# Altium PCB DigitalMaze.PcbDoc
Units mm, origin at the board's own origin, x right, y up, seen from the top; angles counter-clockwise.
Board outline 40.1 x 40.1 mm, 2 copper layers (Top Layer, Bottom Layer); 17 components, 11 nets, 95 pads, 17 vias.
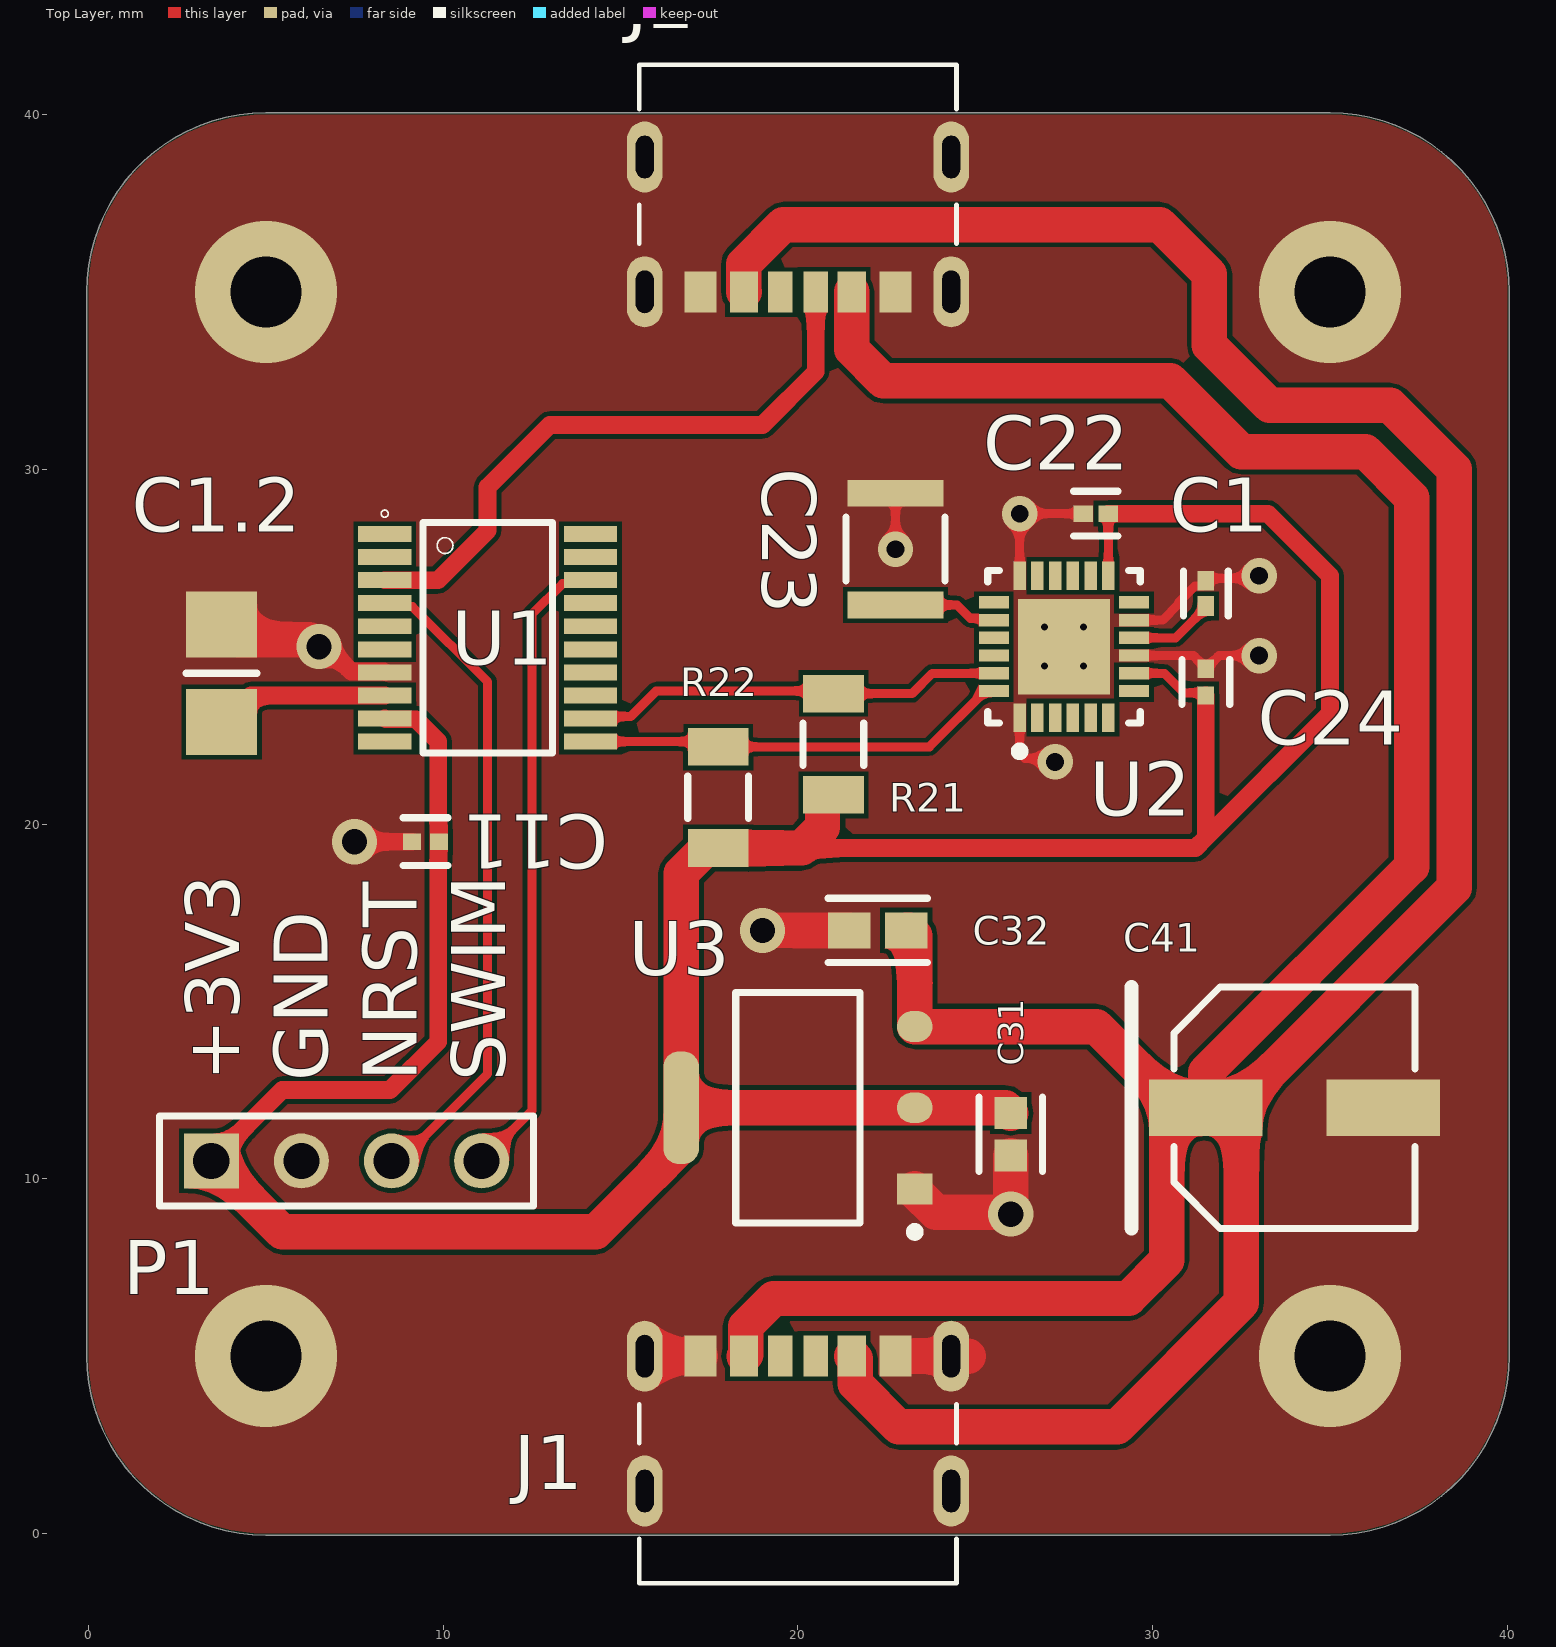
[diagram p0: Top Layer view]
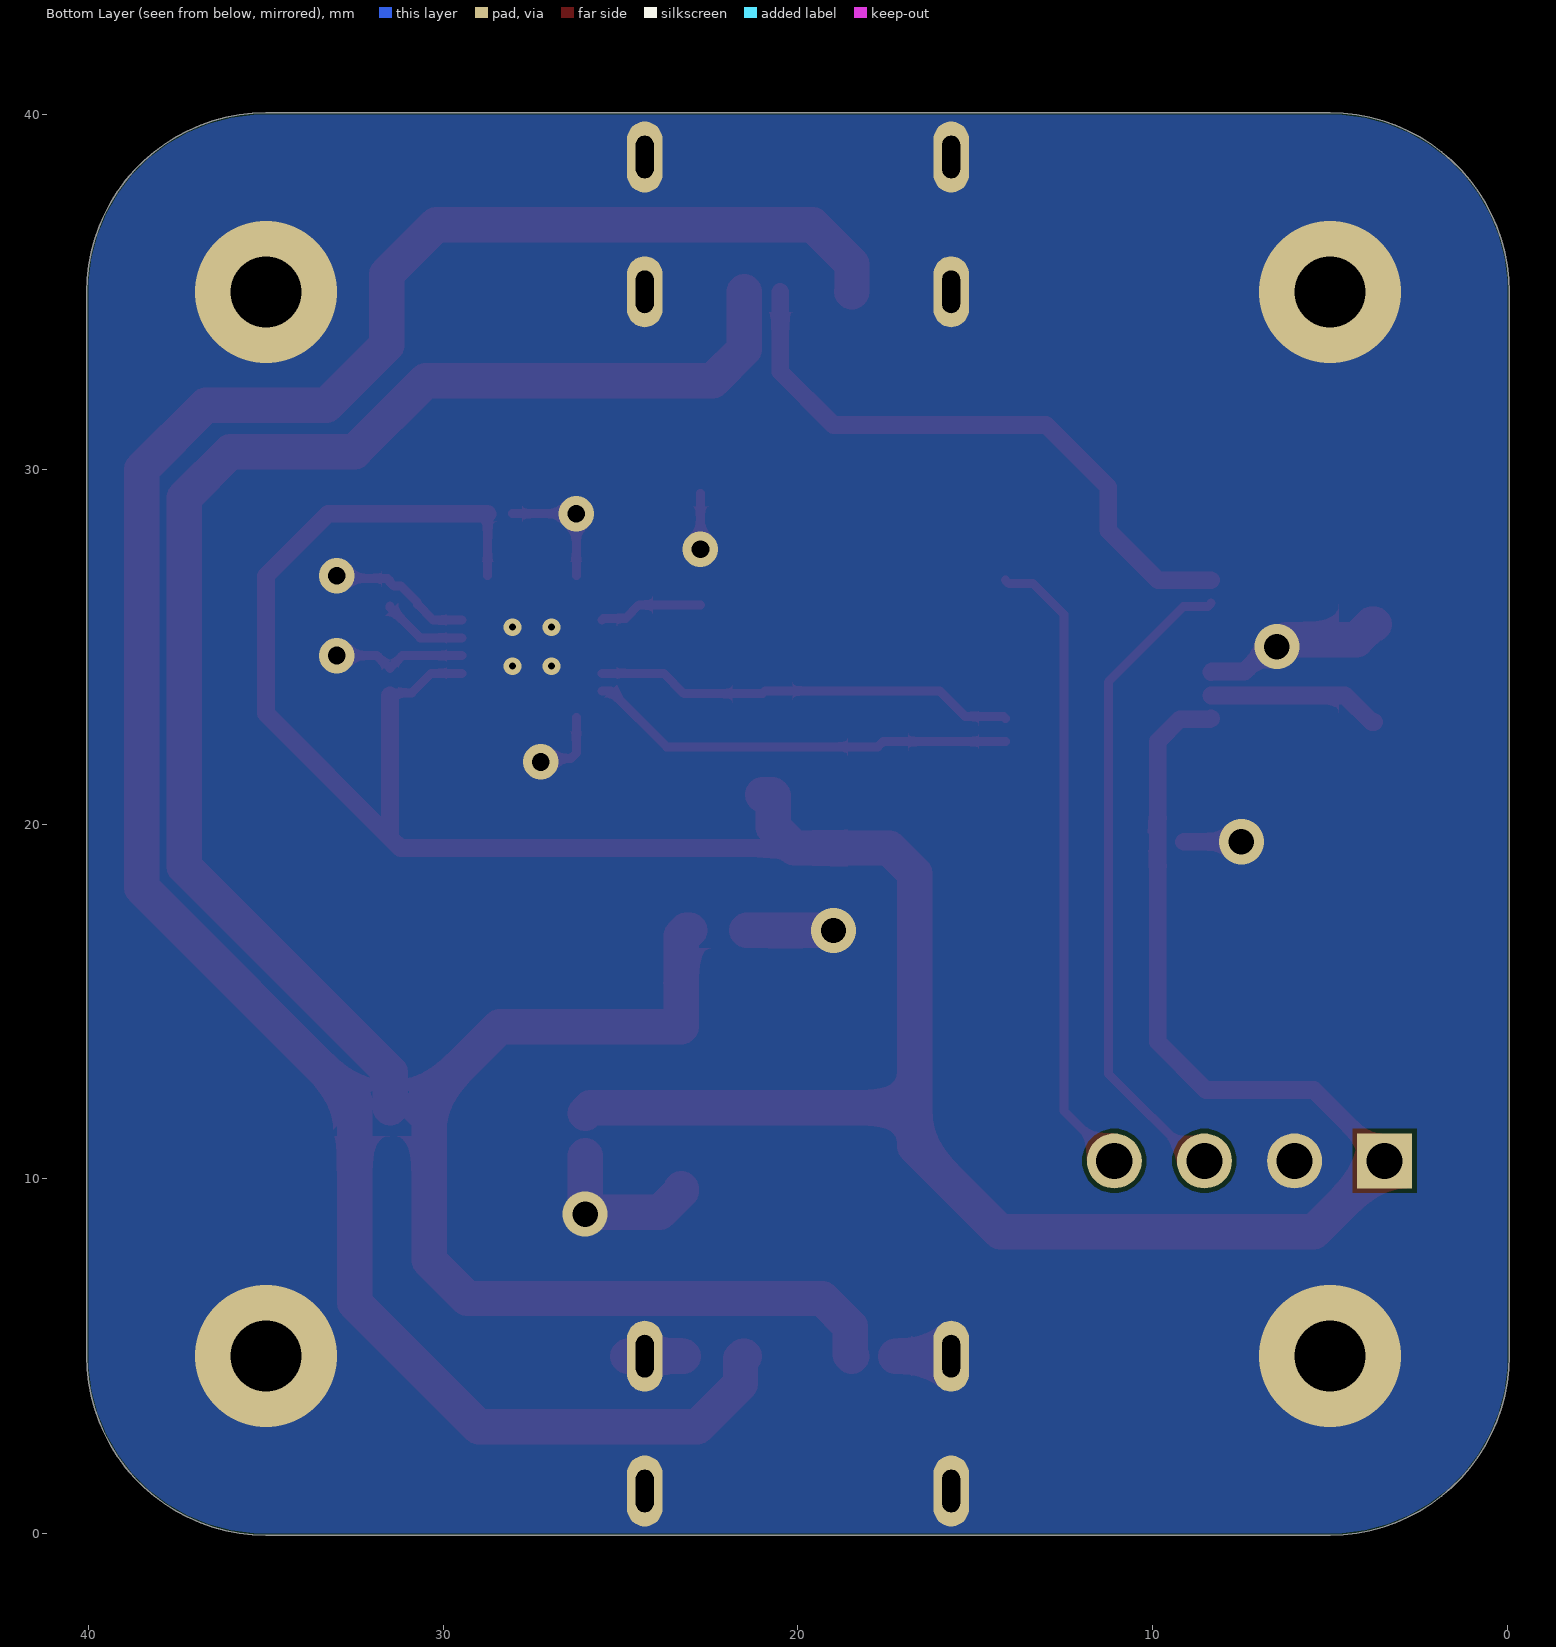
[diagram p1: Bottom Layer view, seen from below]
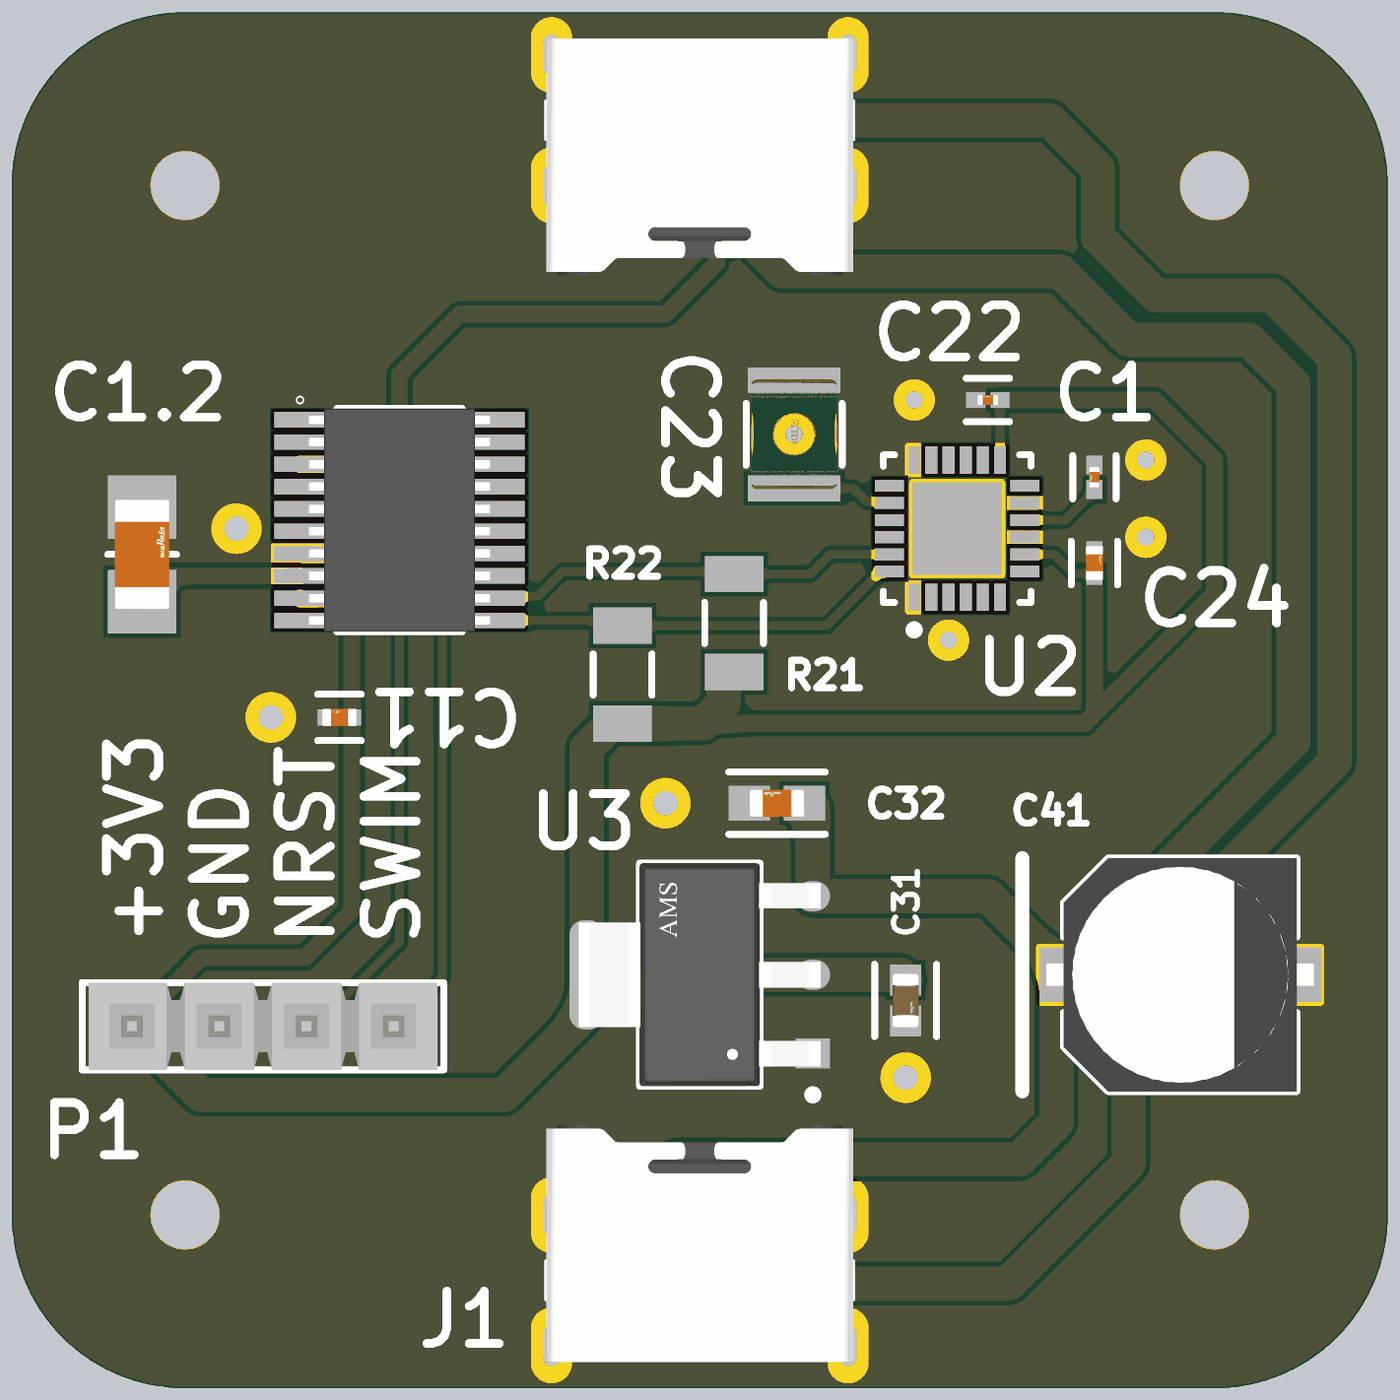
[diagram p2: 3D render of the assembled board from above, using the file's embedded part models]

## Layer stack, top to bottom
Top Solder: solder mask 0.0102, Solder Resist, Dk 3.5
Top Layer: signal copper 0.0356
Dielectric 1: dielectric 0.32, FR-4, Dk 4.8
Bottom Layer: signal copper 0.0356
Bottom Solder: solder mask 0.0102, Solder Resist, Dk 3.5

## Board outline
-0.05,5 -0.05,35 cw(c5,35) 5,40.05 35,40.05 cw(c35,35) 40.05,35 40.05,5 cw(c35,5) 35,-0.05 5,-0.05 cw(c5,5)

## Design rules (kind name [scope] priority, off if disabled: settings)
Clearance [All] p1: gap=0.127 ignorepadtopadclearanceinfootprint=TRUE
MinimumSolderMaskSliver [All] p1: minsoldermaskwidth=0.04
PolygonConnect [All] p1: connectstyle=Direct reliefconductorwidth=0.254 reliefentries=4 polygonreliefangle="90 Angle" airgapwidth=0.254
RoutingVias [All] p1: holewidth=1 width=1 viastyle="Through Hole" minholewidth=0.5 minwidth=1 maxholewidth=2 maxwidth=4
SilkToSolderMaskClearance [IsPad] p1: minsilkscreentomaskgap=0.2 clearancetoexposedcopper=TRUE
SolderMaskExpansion [All] p1: expansion=0.102 istentingtop=FALSE
SupplyNets "Schematic Supply Nets_2" [InNet('VCC_3.3V')] p1: voltage=0.000
SupplyNets "Schematic Supply Nets_1" [InNet('VCC_5V')] p2: voltage=0.000
SupplyNets "Schematic Supply Nets" [InNet('GND')] p3: voltage=0.000
Width [All] p1: maxlimit=1 minlimit=0.254 preferedwidth=0.5
28 further rules are at their usual default settings.

## Components (designator, comment, footprint, x,y, rotation, side; value= is the part's Value field where it differs from the comment)
C1 "0.10uF" FP-GRM033-0_03-IPC_A 31.5,26.5 r270 top
C1.2 "1uF" FP-GCG31C-0_3-IPC_A 3.75,24.25 r90 top
C11 "10nF" FP-GRM155-0_05-IPC_C 9.5,19.5 r180 top
C22 "0.1uF" FP-GRM033-0_03-IPC_A 28.396,28.75 r180 top
C23 "2.2 uF" FP-CGA6P-IPC_C 22.75,27.75 r270 top
C24 "10nF" FP-GRM155-0_05-IPC_C 31.5,24 r90 top
C31 "22uF" FP-GRM188-0_2-IPC_C 26,11.25 r270 top
C32 "10uF" FP-GRM188-0_1-e0_2_0_55-IPC_A 22.25,17 r180 top
C41 "100uF" PNSC-FK-V-D8_V 34,12 r0 top
J1 "UJC-HP-3-SMT-TR" CUI_UJC-HP-3-SMT-TR 20,4.995 r0 top
J2 "UJC-HP-3-SMT-TR" CUI_UJC-HP-3-SMT-TR 20,35.005 r180 top
P1 "TSW-104-08-G-S" SMTC-TSW-104-08-X-S 3.46,10.5 r0 top
R21 "4700 Ω" FP-RC1206-0_65-IPC_B 21,22.25 r270 top
R22 "4700 Ω" FP-RC1206-0_65-IPC_B 17.75,20.75 r270 top
U1 "STM8S103F3P6" SOP65P640X120-20N 11.25,25.25 r0 top
U2 "MPU-6050" IS-QFN-24_V 27.5,25 r90 top
U3 "AMS1117-3.3" FP-AMS1117-IPC_C 20,12 r180 top

## Footprints (in the part's own frame and the unit in brackets; to place one, negate y for a bottom-side part, rotate by r counter-clockwise, add the part's x,y. Pads: shape width x height; smd on the part's side, far side on the other; paste and mask are expansions set on the pad)
CUI_UJC-HP-3-SMT-TR [mm]
  rect 0.7x1.15 smd: A5(-0.5,0.005) B5(0.5,0.005)
  rect 0.8x1.15 smd: A9(1.52,0.005) B9(-1.52,0.005)
  rect 0.9x1.15 smd: A12(2.75,0.005) B12(-2.75,0.005)
  oval 1x2 hole 0.5 slot 1.2 at 90 deg: S1(-4.32,0) S2(4.32,0) S3(-4.32,-3.8) S4(4.32,-3.8)
  silkscreen extent -4.47,-6.4 4.47,-1.35, body extent -4.47,-4.28 4.47,2.62, height 1.93
FP-AMS1117-IPC_C [mm]
  rect 1.004x0.872 smd paste+0 mask+0: 1(-3.295,2.29)
  rrect100% 1.004x0.872 smd paste+0 mask+0: 2(-3.295,0) 3(-3.295,-2.29)
  rrect87% 1.004x3.182 smd paste+0 mask+0: 4(3.295,0)
  silkscreen extent -3.42,-3.25 1.75,3.62, body extent -3.9,-3.35 3.9,3.35, height 0.25
FP-CGA6P-IPC_C [mm]
  rect 0.753x2.704 smd paste+0 mask+0: 1(-1.575,0) 2(1.575,0)
  silkscreen extent -0.9,-1.4 0.9,1.4, body extent -2.05,-1.5 2.05,1.5, height 0.25
FP-GCG31C-0_3-IPC_A [mm]
  rect 1.853x2.004 smd paste+0 mask+0: 1(-1.375,0) 2(1.375,0)
  silkscreen extent 0,-1 0,1, body extent -2.8,-1.5 2.8,1.5, height 0.25
FP-GRM033-0_03-IPC_A [mm]
  rect 0.554x0.463 smd paste+0 mask+0: 1(-0.354,0) 2(0.354,0)
  silkscreen extent -0.63,-0.63 0.63,0.63, body extent -0.83,-0.43 0.83,0.43, height 0.25
FP-GRM155-0_05-IPC_C [mm]
  rect 0.515x0.472 smd paste+0 mask+0: 1(-0.379,0) 2(0.379,0)
  silkscreen extent -0.64,-0.67 0.64,0.67, body extent -0.74,-0.38 0.74,0.38, height 0.25
FP-GRM188-0_1-e0_2_0_55-IPC_A [mm]
  rect 1.208x1.012 smd paste+0 mask+0: 1(-0.802,0) 2(0.802,0)
  silkscreen extent -1.41,-0.91 1.41,0.91, body extent -1.91,-1.01 1.91,1.01, height 0.25
FP-GRM188-0_2-IPC_C [mm]
  rect 0.905x0.906 smd paste+0 mask+0: 1(-0.601,0) 2(0.601,0)
  silkscreen extent -1.05,-0.9 1.05,0.9, body extent -1.15,-0.6 1.15,0.6, height 0.25
FP-RC1206-0_65-IPC_B [mm]
  rect 1.058x1.712 smd paste+0 mask+0: 1(-1.427,0) 2(1.427,0)
  silkscreen extent -0.6,-0.86 0.6,0.86
IS-QFN-24_V [mm] "QFN, 24-Leads, Body 4x4mm, Pitch 0.5mm, Thermal Pad 2.7x2.6mm"
  rect 0.8x0.35 smd: 1(-2,1.25) 2(-2,0.75) 3(-2,0.25) 4(-2,-0.25) 5(-2,-0.75) 6(-2,-1.25) 13(2,-1.25) 14(2,-0.75) 15(2,-0.25) 16(2,0.25) 17(2,0.75) 18(2,1.25)
  rect 0.35x0.85 smd mask+0.102: 7(-1.25,-1.975) 8(-0.75,-1.975) 9(-0.25,-1.975) 10(0.25,-1.975) 11(0.75,-1.975) 12(1.25,-1.975) 19(1.25,1.975) 20(0.75,1.975) 21(0.25,1.975) 22(-0.25,1.975) 23(-0.75,1.975) 24(-1.25,1.975)
  rect 2.7x2.6 smd: 25(0,0)
  silkscreen extent -3.07,-2.15 2.15,2.15, body extent -2,-2 2,2, height 0.95
PNSC-FK-V-D8_V [mm] "CAPAE, 2-Leads, Body 6.80x6.80mm"
  rect 3.2x1.6 smd: 1(-2.5,0) 2(2.5,0)
  silkscreen extent -4.6,-3.4 3.4,3.4, body extent -3.9,-3.4 3.9,3.4, height 8
SMTC-TSW-104-08-X-S [mm] ".025 SQ Post Terminal Strip Assembly, 1x4 Pins, Vertical, 2.54mm Pitch, Male"
  rect 1.55x1.55 hole 1.02: 1(0,0)
  round 1.55 hole 1.02: 2(2.54,0) 3(5.08,0) 4(7.62,0)
  silkscreen extent -1.46,-1.27 9.08,1.27, body extent -1.27,-1.27 8.89,1.27, height 8.38
SOP65P640X120-20N [mm]
  rect 1.5x0.45 smd: 1(-2.9,2.925) 2(-2.9,2.275) 3(-2.9,1.625) 4(-2.9,0.975) 5(-2.9,0.325) 6(-2.9,-0.325) 7(-2.9,-0.975) 8(-2.9,-1.625) 9(-2.9,-2.275) 10(-2.9,-2.925) 11(2.9,-2.925) 12(2.9,-2.275) 13(2.9,-1.625) 14(2.9,-0.975) 15(2.9,-0.325) 16(2.9,0.325) 17(2.9,0.975) 18(2.9,1.625) 19(2.9,2.275) 20(2.9,2.925)
  silkscreen extent -3,-3.25 1.83,3.6, body extent -3.2,-3.25 3.2,3.25, height 0.53

## Part data
C1 C22: library part CMP-2010-01241-2, "Chip Multilayer Ceramic Capacitors for General Purpose, 0201, 0.10uF, X6S, 22%, 10%, 4V", Capacitance=100nF, Case Code (Imperial)=0201, Case Code (Metric)=0603, Dielectric=X6S, Max Operating Temperature=105°C, Min Operating Temperature=-55°C, Package Quantity=1, Tolerance=10%, Voltage Rating=4V, Case/Package=0201, Depth=0.3mm, Height=0.3mm, Lead Free="Lead Free", Length=0.6mm, Mount="Surface Mount", Packaging="Tape and Reel", Radiation Hardening=No, Termination=SMD/SMT, Thickness=0.013inch, Voltage Rating (DC)=4V, Width=0.012inch
C1.2: library part CMP-06035-041741-1, "AgPd Termination Conductive Glue Mounting Chip Multilayer Ceramic Capacitors for Automotive 1206 Package, X8R 15% 16V 1uF 20%"
C11 C24: library part CMP-2008-04637-5, "Chip Multilayer Ceramic Capacitors for General Purpose, 0402, 10000pF, X7R, 15%, 10%, 50V", Case Code (Imperial)=0402, Case Code (Metric)=1005, Dielectric=X7R, Max Operating Temperature=125°C, Min Operating Temperature=-55°C, Package Quantity=1, Tolerance=10%, Voltage=25V, Voltage Rating=50V, Capacitance=10nF, Case/Package=0402, Depth=0.5mm, Height=0.5mm, Lead Free="Lead Free", Length=1mm, Material=Ceramic, Mount="Surface Mount", Number of Pins=2, Packaging="Tape and Reel", Radiation Hardening=No, REACH SVHC="No SVHC", Termination=SMD/SMT, Thickness=0.022inch, Voltage Rating (DC)=50V, Width=0.02inch
C23: library part CMP-08246-000149-1, "Cap Ceramic 2.2uF 50V X7R 10% Pad SMD 1210 +125°C Automotive T/R", Capacitance=2.2uF, Case Code (Imperial)=1210, Case Code (Metric)=3225, Dielectric=X7R, Max Operating Temperature=125°C, Min Operating Temperature=-55°C, Package Quantity=1, Ratings=AEC-Q200, Tolerance=10%, Voltage Rating=50V, Case/Package=1210, Composition=Ceramic, Depth=2.5mm, Height=2mm, Lead Free="Lead Free", Length=3.2mm, Mount="Surface Mount", Packaging="Tape and Reel", REACH SVHC="No SVHC", Termination=SMD/SMT, Thickness=0.087inch, Voltage Rating (DC)=50V, Weight=0.000564oz, Width=2.5mm
C31: library part CMP-2000-06337-3, "Chip Multilayer Ceramic Capacitors for General Purpose, 0603, 22uF, X5R, 15%, 20%, 10V", Case Code (Imperial)=0603, Case Code (Metric)=1608, Dielectric=X5R, Max Operating Temperature=85°C, Min Operating Temperature=-55°C, Package Quantity=4000, Tolerance=20%, Voltage Rating=10V, Capacitance=22uF, Case/Package=0603, Depth=0.8mm, Height=0.8mm, Lead Free="Lead Free", Length=1.6mm, Material=Ceramic, Mount="Surface Mount", Packaging="Tape and Reel", REACH SVHC="No SVHC", Termination=SMD/SMT, Thickness=0.039inch, Voltage Rating (DC)=10V, Weight=0.000222oz, Width=0.8mm
C32: library part CMP-2006-02792-2, "Chip Multilayer Ceramic Capacitors for General Purpose, 0603, 10uF, X5R, 15%, 20%, 6.3V", Case Code (Imperial)=0603, Case Code (Metric)=1608, Dielectric=X5R, Max Operating Temperature=85°C, Min Operating Temperature=-55°C, Package Quantity=4000, Tolerance=20%, Voltage=6.3V, Capacitance=10uF, Case/Package=0603, Depth=0.8mm, Height=0.8mm, Lead Free="Lead Free", Length=1.6mm, Material=Ceramic, Mount="Surface Mount", Packaging="Tape and Reel", Radiation Hardening=No, REACH SVHC="No SVHC", Termination=SMD/SMT, Thickness=0.035inch, Voltage Rating=6.3V, Voltage Rating (DC)=6.3V, Width=0.031inch
C41: library part CMP-2000-06206-1, "Aluminum Electrolytic Capacitor, 100 uF, +/- 20%, 25 V, 2-Pin SMD (Size Code D8), -55 to 105 degC, RoHS, Tape and Reel", Capacitance=100µF, Case Size/Dimension=Ø6.3x7.7mm, Lifetime@Temperature=2000Hrs@105°C, Manufacturer=Panasonic, Operating Temp Range=-55to+105°C, Operating Temp-Max=105°C, Package Description="2-Pin Electrolytic Aluminum Capacitor, Body 6.6 x 6.6 mm", Package Reference=FK-V-D8, Rated Voltage=25V, Ripple Current=280mA, Datasheet URL=http://industrial.panasonic.com/cdbs/www-data/pdf/RDE0000/ABA0000C1181.pdf, Datasheet Version=03/2016, Impedance=0.34O, Manufacturer URL=http://www.panasonic.com/, Mounting Technology=SurfaceMount, Package URL=http://industrial.panasonic.com/cdbs/www-data/pdf/RDE0000/DME0000COL48.pdf, Series=FK, Type=Can
J1 J2: Package=None, Availability=Unavailable, MP=UJC-HP-3-SMT-TR, Price=None
P1: library part CMP-1024-00357-1, "0.025\" SQ Post Header, Through-hole, Vertical, -55 to 125 degC, 2.54 mm Pitch, 4-Pin, Male, RoHS", Manufacturer=Samtec, Temperature Range="-55 to 125 degC", ComponentLink1Description="Manufacturer URL", ComponentLink1URL=http://www.samtec.com, ComponentLink2Description=Datasheet, ComponentLink2URL=http://www.samtec.com/documents/webfiles/pdf/TSW_TH.PDF, ComponentLink3Description="Package Specification", ComponentLink3URL=http://www.samtec.com/documents/webfiles/cpdf/TSW-XXX-XX-XXX-X-XX-XXX-MKT.pdf, DatasheetVersion=F-214, Mounting Technology=Through-hole, Orientation=Vertical, PackageDescription=".025[0.64] SQ. Post Terminal Strip Assembly", PackageReference=TSW-104-08-X-S, PackageVersion="DM, 8/1988", PartNumber=TSW-104-08-G-S, Pitch="2.54 mm", RoHS=True
R21 R22: library part CMP-03412-037805-1, "RES SMD 4.7K OHM 1% 1/4W 1206", Case Code (Imperial)=1206, Case Code (Metric)=3216, Max Operating Temperature=155°C, Max Power Dissipation=250mW, Min Operating Temperature=-55°C, Package Quantity=1, Resistance=4.7kR, Resistance Tolerance=1%, Resistor Type="Thick Film", Temperature Coefficient=100ppm/°C, Voltage Rating=200V, Case/Package=1206, Construction=Rectangular, Depth=1.6mm, Features="Moisture Resistant", Height=0.026inch, Lead Free="Lead Free", Length=0.122inch, Military Standard=Not, Number of Pins=2, Number of Terminations=2, Packaging="Tape and Reel", Power Rating=250mW, RoHS Compliant=Yes, Series=RC, Size Code=1206, Termination=SMD/SMT, Tolerance=1%, Voltage Rating (DC)=200V, Width=0.063inch
U1: "STM8 series Microcontroller IC 8-Bit 16MHz 8KB (8K x 8) FLASH 20-TSSOP", Package="TSSOP-20 STMicroelectronics", Check_prices=https://www.snapeda.com/parts/STM8S103F3P6/STMicroelectronics/view-part/?ref=eda, MF=STMicroelectronics, MP=STM8S103F3P6, SnapEDA_Link=https://www.snapeda.com/parts/STM8S103F3P6/STMicroelectronics/view-part/?ref=snap
U2: library part CMP-1753-00002-2, "3-Axis Gyroscope, Accelerometer and a Digital Motion Processor(TM) (DMP), 2.375 to 3.46 V, -40 to 85 degC, 24-Pin QFN, RoHS, Tape and Reel", Manufacturer=InvenSense, Standard Package=5,000, Category=Sensors,Transducers, Datasheet URL=http://datasheet.octopart.com/MPU-6050-InvenSense-datasheet-14421344.pdf, Datasheet Version="Rev. 3.3, 05/2012", Dynamic Catalog=MPU-6000™Series, Family=Multifunction, Featured Product=MPU-60506-Axis,IntegratedI²CSolution, Manufacturer URL=http://www.invensense.com/, Online Catalog=MPU-6000™Series, Other Names="1428-1007-2 / MPU6050", Output Type=Digital, Sensor Type=MotionTracking, Unit PriceUSD=Digital
U3: library part CMP-209535-000001-1, "LDO Voltage Regulators 1A, 3.3V", Dropout Voltage=1.1V, Manufacturer="Advanced Monolithic Systems", Max Junction Temp=+125°C, Max Power Dissipation=1.2W, Max Supply Voltage=15V, Nominal Supply Current=5mA, Output Current=1A, Output Voltage=3.3V, Package=AMS1117, Temperature="-40°C to +125°C", Temperature Range Low=-40°C, Automotive=No, Category=IC, ComponentLink2Description=Datasheet, ComponentLink2URL=http://www.advanced-monolithic.com/pdf/ds1117.pdf, Device Class L1="Integrated Circuits (ICs)", Device Class L2="Power Management ICs", Device Class L3="Voltage Regulators - Linear", Height=1.8mm, Ipc Land Pattern Name=SOT229P700X180-4, Lead Free=Yes, Manufacturer Part Number=AMS1117-3.3, Number Of Outputs=1, Octopart=https://octopart.com/ams1117-3.3-advanced+monolithic+systems-25899300, Output Type=Fixed, RoHS=TRUE, Standoff Height=0.64mm, Temperature Range High=+125°C

## Via types
v1: diameter 1, hole 0.5, Top Layer to Bottom Layer, 5 vias
v2: diameter 1.27, hole 0.711, Top Layer to Bottom Layer, 4 vias
v3: diameter 4, hole 2, Top Layer to Bottom Layer, 4 vias
v4: diameter 0.5, hole 0.2, Top Layer to Bottom Layer, 4 vias

## Nets (pads, with @x,y where several pads share a name; then routed paths per layer and width w, separated by ;. In a path a pad name is that pad's centre, name@x,y a point inside that pad or via, vN(x,y) a via of type N, cw(c..) or ccw(c..) an arc to the next point about the centre after c; other vN are vias at no path point)
GND: C1.1 C1.2.2 C11.2 C22.2 C23.1 C24.2 C31.2 C32.2 C41.2 J1.A12 J1.B12 J1.S1 J1.S2 J1.S3 J1.S4 J2.A12 J2.B12 J2.S1 J2.S2 J2.S3 J2.S4 P1.2 U1.7 U2.1 U2.9 U2.11 U2.18 U2.25 U3.1 | length 32.2
  Top Layer w0.254: v1(22.75,27.75) C23.1 ; U2.1 26.25,22 26.399,21.851 27.149,21.851 v1(27.25,21.75) ; U2.18 v1(26.25,28.75) C22.2 ; U2.9 31.15,24.75 C24.2@31.5,24.4 ; U2.11 30.281,25.75 30.722,26.191 30.722,26.236 31.191,26.704 31.396,26.704 31.5,26.809 C1.1 31.573,26.927 32.927,26.927 v1(33,27) ; C24.2 C24.2@31.5,24.4 ; v1(33,24.75) 31.871,24.75 31.631,24.509 31.609,24.509 C24.2@31.5,24.4
  Top Layer w0.5: v2(6.5,25) 6.708,25 7.408,24.3 8.325,24.3 U1.7 ; v2(7.5,19.5) C11.2
  Top Layer w1: C1.2.2 3.825,25.625 4.252,25.199 6.228,25.199 6.427,25 v2(6.5,25) ; J1.S1 15.68,4.998 17.248,4.998 J1.B12 ; v2(19,17) C32.2 ; 23.232,4.998 24.8,4.998 J1.S2@24.8,4.995 ; U3.1 23.295,9.648 23.892,9.052 25.948,9.052 v2(26,9) C31.2
  other v3: 5,5 35,5 5,35 35,35
  other v4: 26.95,24.45 28.05,24.45 26.95,25.55 28.05,25.55
LED_VIN: J2.A5 U1.3 | length 17.6
  Top Layer w0.5: U1.3 9.85,26.875 11.25,28.275 11.25,29.5 13,31.25 19,31.25 20.5,32.75 J2.A5
NetC1.2_1: C1.2.1 U1.8 | length 4.9
  Top Layer w0.5: C1.2.1 3.825,22.875 4.576,23.625 U1.8
NetC1_2: C1.2 U2.10 | length 2.4
  Top Layer w0.254: U2.10 30.65,25.25 31.5,26.1 C1.2
NetC23_2: C23.2 U2.20 | length 3
  Top Layer w0.254: C23.2 24.483,26.175 24.86,25.798 25.477,25.798 U2.20
NRST: P1.3 U1.4 | length 18.6
  Top Layer w0.254: U1.4 8.448,26.127 9.132,26.127 11.25,24.009 11.25,12.96 8.79,10.5 P1.3
SCL: R21.1 U1.12 U2.23 | length 12
  Top Layer w0.254: U1.12 14.206,23.031 15.281,23.031 16,23.75 20.927,23.75 R21.1 23.216,23.677 23.789,24.25 U2.23
SDA: R22.1 U1.11 U2.24 | length 12.1
  Top Layer w0.254: U1.11 17.602,22.325 R22.1 23.702,22.177 25.275,23.75 U2.24
SWIM: P1.4 U1.18 | length 18
  Top Layer w0.254: P1.4 12.5,11.92 12.5,25.909 13.368,26.777 14.052,26.777 U1.18
VCC_3.3V: C11.1 C22.1 C24.1 C31.1 P1.1 R21.2 R22.2 U1.9 U2.8 U2.13 U3.2 U3.4 | length 91.3
  Top Layer w0.254: U2.13 C22.1 ; U2.8 30.333,24.25 30.883,23.7 31.421,23.7 C24.1
  Top Layer w0.5: P1.1 5.46,12.5 8.5,12.5 9.857,13.857 9.857,22.326 9.233,22.95 8.375,22.95 U1.9 ; 20.106,19.323 31.207,19.323 31.5,19.616 ; C22.1 33.25,28.75 35,27 35,23.116 31.5,19.616 ; C24.1 31.5,19.616
  Top Layer w1: P1.1 5.46,8.5 14.294,8.5 16.705,10.911 U3.4 ; R21.2 20.721,20.823 20.692,20.794 20.692,19.909 20.106,19.323 R22.2 17.423,19.323 16.705,18.605 U3.4 ; C31.1 25.851,12 U3.2 U3.4
VCC_5V: C32.1 C41.1 J1.A9 J1.B9 J2.A9 J2.B9 U3.3 | length 132.8
  Top Layer w1: J1.B9 18.523,5.043 18.523,5.835 19.31,6.622 29.322,6.622 30.4,7.7 30.4,11.7 30.7,12 28.41,14.29 U3.3 23.295,16.855 23.15,17 C32.1 ; J2.A9 18.476,35.004 18.476,35.788 19.588,36.9 30.2,36.9 31.6,35.5 31.6,33.5 33.3,31.8 36.7,31.8 38.5,30 38.5,18.2 32.5,12.2 32.5,6.5 29,3 22.838,3 21.62,4.218 21.62,4.925 21.545,5 J1.A9 ; J2.B9 21.52,33.38 22.4,32.5 30.5,32.5 32.5,30.5 36,30.5 37.3,29.2 37.3,18.8 31.5,13 C41.1
pads on no net: J1.A5 J1.B5 J2.B5 U1.1 U1.2 U1.5 U1.6 U1.10 U1.13 U1.14 U1.15 U1.16 U1.17 U1.19 U1.20 U2.2 U2.3 U2.4 U2.5 U2.6 U2.7 U2.12 U2.14 U2.15 U2.16 U2.17 U2.19 U2.21 U2.22

## Polygon pours and split planes (outlines as drawn)
GND on Bottom Layer "GND_L02_P001" (solid, pour order 1): 0,5 0,35 cw(c5,35) 5,40 35,40 cw(c35,35) 40,35 40,5 cw(c35,5) 35,0 5,0 cw(c5,5)
GND on Top Layer "GND_L01_P000" (solid, pour order 0): 0,5 0,35 cw(c5,35) 5,40 35,40 cw(c35,35) 40,35 40,5 cw(c35,5) 35,0 5,0 cw(c5,5)

## Silkscreen, mask and mechanical layers (free items; w line width, h text height)
Top Overlay:
  text "+3V3" at 4.246,12.754 h1.52 r90
  text "GND" at 6.746,12.754 h1.52 r90
  text "NRST" at 9.246,12.754 h1.52 r90
  text "SWIM" at 11.746,12.754 h1.52 r90
Mechanical 1:
  lines w0.1: 0,5 ccw(c5,5) 5,0 ; 0,5 0,12.5 0,27.5 0,35 ; 0,5 5,0 ; 0,35 cw(c5,35) 5,40 ; 0,35 5,40 ; 5,0 35,0 ; 5,40 35,40 ; 35,0 ccw(c35,5) 40,5 ; 35,0 40,5 ; 35,40 cw(c35,35) 40,35 ; 35,40 40,35 ; 40,5 40,35 ; 46.5,5.25 ccw(c51.5,5.25) 51.5,0.25 81.5,0.25 ccw(c81.5,5.25) 86.5,5.25 86.5,35.25 ccw(c81.5,35.25) 81.5,40.25 51.5,40.25 ccw(c51.5,35.25) 46.5,35.25 46.5,27.75 46.5,12.75 46.5,5.25